# Altium PCB BRD110806.PcbDoc
Units mil, origin at the board's own origin, x right, y up, seen from the top; angles counter-clockwise.
Board outline 2710.03 x 2110.03 mil, 2 copper layers (Top Layer, Bottom Layer), stack 65.792 mil thick; 16 components, 30 nets, 118 pads, 16 vias.
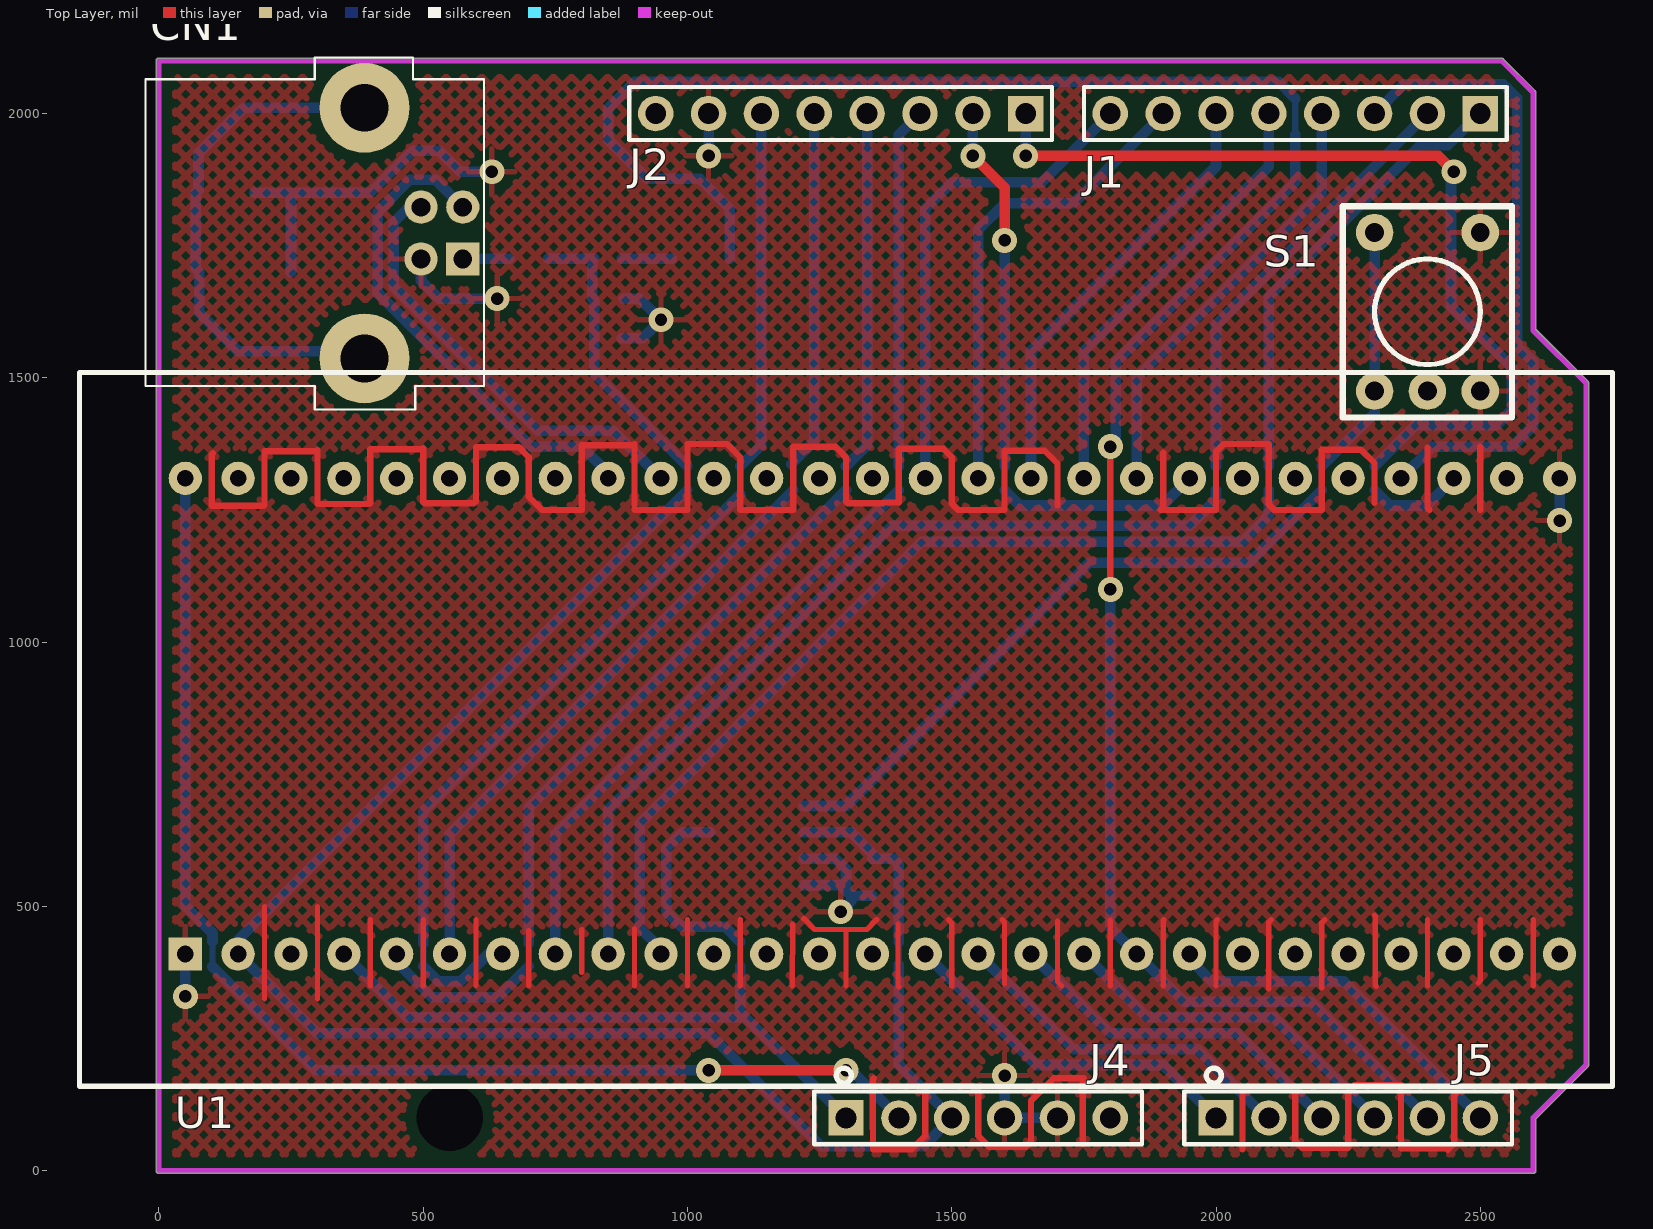
[diagram p0: Top Layer view]
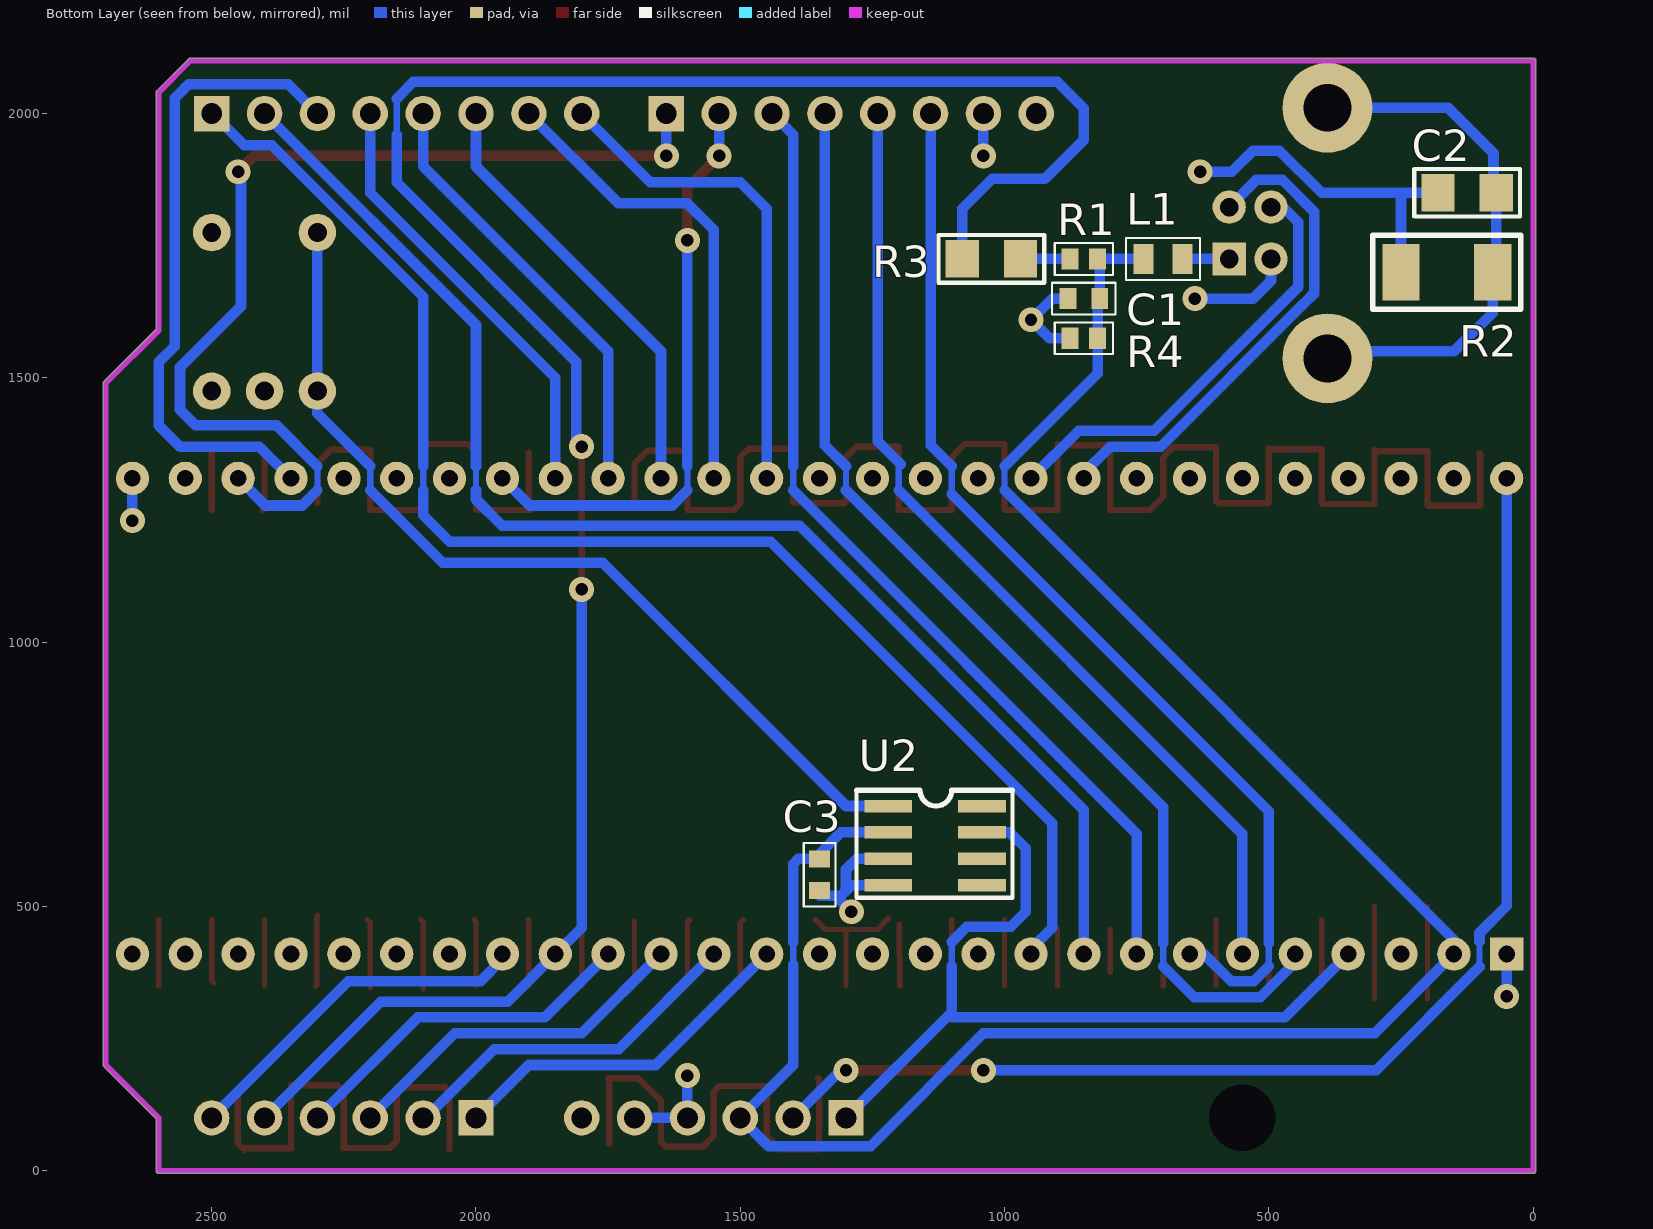
[diagram p1: Bottom Layer view, seen from below]

## Layer stack, top to bottom
Top Layer: signal copper 1.4
Dielectric: core 62.9921, FR-4, Dk 4.8
Bottom Layer: signal copper 1.4

## Board outline
0,-5.01 2600,-5.01 ccw(c2600,0) 2605.02,0 2605.02,97.92 2703.53,196.44 ccw(c2700,200) 2705.02,200 2705.02,1490 cw(c2702.5,1490) 2705.02,1489.97 ccw(c2700,1490) 2705.02,1490 ccw(c2700,1490) 2703.53,1493.56 2703.55,1493.55 2605.02,1592.08 2605.02,2040 cw(c2602.5,2040) 2605.02,2039.97 ccw(c2600,2040) 2605.02,2040 ccw(c2600,2040) 2603.53,2043.56 2603.55,2043.55 2543.55,2103.55 2543.56,2103.53 ccw(c2540,2100) 2540,2105.02 ccw(c2540,2102.5) 2539.97,2105.02 cw(c2540,2100) 2540,2105.02 0,2105.02 ccw(c0,2100) -5.01,2100 -5.01,0 ccw(c0,0)

## Design rules (kind name [scope] priority, off if disabled: settings)
Clearance Clearance_1 [InPolygon] p1: gap=20
Clearance Clearance_BoardEdge [InPolygon vs (OnLayer('Keep-Out Layer'))] p2: gap=15
Clearance [All] p3: gap=10
DiffPairsRouting [All] p1: maxlimit=10 minlimit=10 mostfreqgap=10 maxuncoupledlength=500
HoleSize [All] p1: absolutevalues=TRUE maxlimit=125.98 minlimit=23.62 maxpercent=80.000 minpercent=20.000
MinimumAnnularRing [All] p1: minimumring=10
PolygonConnect [All] p1: connectstyle=Relief reliefconductorwidth=10 reliefentries=4 polygonreliefangle="90 Angle"
RoutingVias [All] p1: holewidth=23.62 width=47.24 viastyle="Through Hole" minholewidth=23.62 minwidth=47.24 maxholewidth=23.62 maxwidth=47.24
SilkscreenOverComponentPads [All] p1: minsilkscreentomaskgap=10
SolderMaskExpansion [All] p1: expansion=0
Width [All] p1: maxlimit=100 minlimit=10 preferedwidth=20
25 further rules are at their usual default settings.

## Classes and differential pairs
differential pair USB_D: +USB_D_P -USB_D_N

## Components (designator, comment, footprint, x,y, rotation, side; value= is the part's Value field where it differs from the comment)
C1 "YCAM100N-3" CA_0603 850,1650 r0 bottom
C2 "YCAM10N-5" CA_1206 125,1850 r180 bottom
C3 "YCAM100N-3" CA_0603 1350,560 r90 bottom
CN1 "CNUSB04F3" CN_USB_B 575,1725 r270 top
J1 "SSW-108-01-T-S" CN_SOCKET8 2500,2000 r180 top
J2 "SSW-108-01-T-S" CN_SOCKET8 1640,2000 r180 top
J4 "SSW-106-01-T-S" CN_SOCKET6 1300,100 r0 top
J5 "SSW-106-01-T-S" CN_SOCKET6 2000,100 r0 top
L1 "47uH/120mA" CL_0805 700,1725 r0 bottom
R1 "YRES10K-1" RE_0603 850,1725 r180 bottom
R2 "1M/500V" RE_2010 250,1700 r180 bottom
R3 "0E" RE_1206 1025,1725 r0 bottom
R4 "YRES200K-1" RE_0603 850,1575 r180 bottom
S1 "KSJ0M411" SW_KSJ-M 2400,1475 r90 top
U1 "LPCXpresso LPC1769" MD_LPCXpresso 50,410 r90 top
U2 "YICSMAX707" SC_SOIC8 1220,690 r180 bottom

## Footprints (in the part's own frame and the unit in brackets; to place one, negate y for a bottom-side part, rotate by r counter-clockwise, add the part's x,y. Pads: shape width x height; smd on the part's side, far side on the other; paste and mask are expansions set on the pad)
CA_0603 [mil] "CA_0603"
  rect 32x40 smd: 1(-30,0) 2(30,0)
  silkscreen extent -60,-30 60,30, body extent -31,-16 31,16, height 12
CA_1206 [mm] "Chip Capacitor; Body 3.2 x 1.6 mm (LxW typ)"
  rect 1.6x1.8 smd: 1(-1.4,0) 2(1.4,0)
  silkscreen extent -2.54,-1.14 2.54,1.14, body extent -1.6,-0.8 1.6,0.8, height 1
CL_0805 [mil] "0805 package for coil or ferrite"
  rect 38x56 smd: 1(-37,0) 2(37,0)
  silkscreen extent -70,-40 70,40, body extent -39,-26 39,24, height 31
CN_SOCKET6 [mm] "Connector; Header; 6 Position"
  rect 1.7x1.7 hole 1: 1(0,0)
  round 1.7 hole 1: 2(2.54,0) 3(5.08,0) 4(7.62,0) 5(10.16,0) 6(12.7,0)
  silkscreen extent -1.52,-1.27 14.22,2.39, body extent -1.52,-1.27 14.22,1.14, height 8.52
CN_SOCKET8 [mm] "Connector; Header; 8 Position"
  rect 1.7x1.7 hole 1: 1(0,0)
  round 1.7 hole 1: 2(2.54,0) 3(5.08,0) 4(7.62,0) 5(10.16,0) 6(12.7,0) 7(15.24,0) 8(17.78,0)
  silkscreen extent -1.27,-1.27 19.05,1.27, body extent -1.52,-1.21 19.3,1.21, height 8.51
CN_USB_B [mil] "CN_USB_B"
  rect 63x63 hole 35.43: 1(0,0)
  round 63 hole 35.43: 2(-98,0) 3(-98,-79) 4(0,-79)
  round 170 hole 90.55: 5(-286,-186) 5(188,-186)
  silkscreen extent -381,-600 285,40, body extent -332,-590 234,28, height 453
MD_LPCXpresso [mm] "LPCXpresso board"
  rect 1.6x1.6 hole 0.8: 1(0,0)
  round 1.6 hole 0.8: 2(0,-2.54) 3(0,-5.08) 4(0,-7.62) 5(0,-10.16) 6(0,-12.7) 7(0,-15.24) 8(0,-17.78) 9(0,-20.32) 10(0,-22.86) 11(0,-25.4) 12(0,-27.94) 13(0,-30.48) 14(0,-33.02) 15(0,-35.56) 16(0,-38.1) 17(0,-40.64) 18(0,-43.18) 19(0,-45.72) 20(0,-48.26) 21(0,-50.8) 22(0,-53.34) 23(0,-55.88) 24(0,-58.42) 25(0,-60.96) 26(0,-63.5) 27(0,-66.04) 28(22.86,0) 29(22.86,-2.54) 30(22.86,-5.08) 31(22.86,-7.62) 32(22.86,-10.16) 33(22.86,-12.7) 34(22.86,-15.24) 35(22.86,-17.78) 36(22.86,-20.32) 37(22.86,-22.86) 38(22.86,-25.4) 39(22.86,-27.94) 40(22.86,-30.48) 41(22.86,-33.02) 42(22.86,-35.56) 43(22.86,-38.1) 44(22.86,-40.64) 45(22.86,-43.18) 46(22.86,-45.72) 47(22.86,-48.26) 48(22.86,-50.8) 49(22.86,-53.34) 50(22.86,-55.88) 51(22.86,-58.42) 52(22.86,-60.96) 53(22.86,-63.5) 54(22.86,-66.04)
  silkscreen extent -6.35,-68.58 27.94,5.08, body extent -6.35,-68.58 27.94,5.08, height 11.21
RE_0603 [mil] "RE_0603"
  rect 32x40 smd: 1(-26,0) 2(26,0)
  silkscreen extent -55,-30 55,30, body extent -31,-16 31,16, height 12
RE_1206 [mm] "Chip Resistor; Body 3.2 x 1.6 mm (LxW typ)"
  rect 1.6x1.8 smd: 1(-1.4,0) 2(1.4,0)
  silkscreen extent -2.54,-1.14 2.54,1.14, body extent -1.6,-0.8 1.6,0.8, height 1
RE_2010 [mm] "Chip Resistor; Body 5 x 2.5 mm (LxW typ)"
  rect 1.8x2.7 smd: 1(0,0) 2(4.4,0)
  silkscreen extent -1.36,-1.78 5.76,1.78, body extent -0.8,-1.35 5.2,1.35, height 0.62
SC_SOIC8 [mm] "8-Pin Small Outline Integrated Circuit 1.27 mm Pitch, IPC High Density"
  rect 2.3x0.6 smd: 1(0,0) 2(0,-1.27) 3(0,-2.54) 4(0,-3.81) 5(4.5,-3.81) 6(4.5,-2.54) 7(4.5,-1.27) 8(4.5,0)
  silkscreen extent -1.52,-4.41 5.97,0.76, body extent -0.74,-4.36 5.31,0.54, height 1.68
SW_KSJ-M [mm] "C&K SPST switch"
  round 1.8 hole 0.9: 0(0,0) 1(0,-2.54) 1(7.62,-2.54) 2(0,2.54) 2(7.62,2.54)
  silkscreen extent -1.27,-4.06 8.89,4.06, body extent -0.65,-3.7 8.27,3.7, height 6.63

## Part data
C1 C3: library part YCAM100n-3
J1 J2 J4 J5: "*"
L1: library part L0805C470MDWIT
R1 R4: "Resistor"
R2: library part LHVC2010-1MFT4, "Resistor"
R3: library part YRES0E, "Resistor"
U1: library part OM13000

## Free pads (board coordinates)
  round 0 hole 125.98 unplated: 0(550,100)

## Via types
v1: diameter 47.24, hole 23.62, Top Layer to Bottom Layer, 16 vias

## Nets (pads, with @x,y where several pads share a name; then routed paths per layer and width w, separated by ;. In a path a pad name is that pad's centre, name@x,y a point inside that pad or via, vN(x,y) a via of type N, cw(c..) or ccw(c..) an arc to the next point about the centre after c; other vN are vias at no path point)
+3.3V: J4.2 U1.28 | length 2362.5
  Top Layer w20: v1(1040,190) v1(1300,190)
  Bottom Layer w12: 101.5,385.68 101.5,434.32
  Bottom Layer w20: U1.28 50,501.28 101.5,449.78 101.5,434.32 ; 101.5,385.68 297.17,190 v1(1040,190) ; v1(1300,190) 1310,190 J4.2
+5V: C1.1 C3.2 J4.3 L1.2 R1.2 R4.2 U1.2 U2.2 | length 4075.1
  Bottom Layer w12: 1000,1287.17 1000,1332.83 ; 1400,390 1400,432.83
  Bottom Layer w20: L1.2 R1.2 820,1721 C1.1 824,1646 R4.2 824,1508.83 1000,1332.83 ; 1000,1287.17 150,437.17 U1.2 300,260 1040,260 1253.46,46.54 1446.54,46.54 J4.3 1400,200 1400,390 ; U2.2 1310,640 C3.2@1350,600 ; C3.2 1390,590 1400,580 1400,432.83
AIN0: J5.1 U1.15 | length 678.4
  Bottom Layer w20: U1.15 1660,200 1900,200 J5.1
AIN1: J5.2 U1.16 | length 678.4
  Bottom Layer w20: U1.16 1730,230 1965.21,230 2095.21,100 J5.2
AIN2: J5.3 U1.17 | length 678.4
  Bottom Layer w20: U1.17 1800,260 2040,260 J5.3
AIN3: J5.4 U1.18 | length 678.4
  Bottom Layer w20: U1.18 1870,290 2110,290 J5.4
AIN4: J5.5 R3.2 U1.19 | length 4255.2
  Top Layer w12: v1(1800,1100) v1(1800,1370)
  Bottom Layer w12: 2150,1960 2150,2028.39
  Bottom Layer w20: R3.2 1080.12,1819.88 1023.62,1876.38 923.62,1876.38 850,1950 850,2010 900,2060 2118.39,2060 2150,2028.39 ; v1(1800,1100) 1800,460 U1.19 1940,320 2180,320 J5.5 ; v1(1800,1370) 1800,1360 1810,1370 1810,1530 2150,1870 2150,1960
AIN5: J5.6 U1.20 | length 684.3
  Bottom Layer w20: U1.20 1950,400 1991.5,358.5 2241.5,358.5 J5.6
EINT0: J1.3 U1.51 | length 1227.3
  Bottom Layer w20: J1.3 2355.43,2055.43 2543.72,2055.43 2549.15,2050 2550,2050 2550,2049.15 2570,2029.15 2570,1560 2600,1530 2600,1410 2560,1370 2410,1370 U1.51
EINT1: J2.1 U1.52 | length 1935.7
  Top Layer w20: v1(1640,1920) 2420,1920 v1(2450,1890)
  Bottom Layer w12: 2300,1287.17 2300,1332.83
  Bottom Layer w20: v1(1640,1920) J2.1 ; 2300,1287.17 2328.67,1258.5 2398.5,1258.5 U1.52 ; 2300,1332.83 2377.17,1410 2530,1410 2560,1440 2560,1520 2444.57,1635.43 2444.57,1884.57 v1(2450,1890)
GND: C1.2 C2.1 C3.1 CN1.4 J2.7 J4.4 J4.5 R2.1 R4.1 S1.1 U1.1 U1.54 U2.3 U2.4 | length 11548.2
  Top Layer w10: 200,325 200,500 ; 300,325 300,500 ; 400,350 400,475 ; 500,350 500,475 ; 600,350.51 600,475 ; 700,350 700,454.16 ; 800,375 800,455.98 ; 900,350 900,457.81 ; 1000,349.65 1000,475 ; 1100,349.65 1100,475 ; 1198.53,350 1199.25,466.48 ; 1220.34,476.88 1240.72,456.5 1300,456.5 ; 1300,349.65 1300,456.5 ; 1357.98,475 1339.48,456.5 1300,456.5 ; 1398.55,466.48 1398.55,349.28 1400,347.83 ; 1493.75,475 1500,468.75 1500,350 ; 1595.57,475 1600,470.57 1600,353.49 ; 1700,472.39 1700,357.64 1707.64,350 ; 1800,350 1800,474.22 ; 1900,350 1900,473.96 1901.04,475 ; 2000,350 2000,472.14 2002.86,475 ; 2100,343.92 2100,470.31 2104.69,475 ; 2200,345.74 2200,469 2206,475 ; 2300,483.33 2301.36,481.97 2301.36,350.95 2303.32,348.99 ; 2400,349.39 2400,475 ; 2496.04,355.17 2500,359.13 2500,475 ; 2600,350 2600,475
  Top Layer w12: 101.9,1357.73 100,1355.82 100,1257.81 198.18,1257.81 200,1259.63 200,1361.45 298.18,1361.45 300,1363.28 300,1261.45 398.18,1261.45 400,1263.28 400,1365.1 498.18,1365.1 500,1366.92 500,1265.1 502.6,1262.5 595.58,1262.5 600,1266.92 600,1368.75 681.25,1368.75 700,1350 700,1275 725,1250 800,1250 800,1372.39 898.18,1372.39 900,1374.22 900,1250 1000,1250 1000,1375 1075,1375 1100,1350 1100,1250 1200,1250 1200,1369.71 1280.29,1369.71 1300,1350 1300,1266.06 1303.56,1262.5 1369.67,1262.5 1371.41,1264.24 1400,1264.24 1400,1366.06 1483.94,1366.06 1500,1350 1500,1262.41 1512.41,1250 1600,1250 1600,1362.41 1675.97,1362.41 1700,1338.39 1700,1258.77 ; 1352.51,175 1350.54,173.02 1350.54,79.51 1351.21,78.83 1351.21,40.54 1424.38,40.54 1450,66.15 1450,160.24 1539.76,160.24 1550,150 1550,66.16 1570.46,45.7 1640.93,45.7 1650,54.77 1650,132.19 1692.81,175 1750,175 1748.05,173.05 1748.05,50.99 ; 1900,1358.51 1900,1255.12 1894.88,1250 2000,1250 2000,1360.33 2014.67,1375 2100,1375 2100,1260.33 2110.33,1250 2200.35,1250 2200,1250.35 2200,1363.98 2274.41,1363.98 2300,1338.39 2300,1263.98 ; 2050,40.54 2050,149.3 2059.46,158.76 2060.07,158.16 2150,158.16 2150,56.33 2163.34,42.99 2249.16,42.99 2250,43.83 2250,150 2261.8,161.8 2350,161.8 2350,43.14 2350.57,42.57 2435.29,42.57 2438.18,39.68 2450.54,52.04 2450.54,142.54 2454,146 ; 2400,1367.63 2400,1254 2404,1250 ; 2500,1250 2500,1369.45
  Bottom Layer w20: v1(50,330) U1.1 ; C2.1 250,1850 ; R2.1 250,1850 ; CN1.4 496,1684 530,1650 v1(640,1650) ; v1(630,1890) 570,1890 530,1930 480,1930 400,1850 250,1850 ; R4.1 915,1575 v1(950,1610) 910,1650 C1.2 ; v1(1040,1920) J2.7 ; U2.4 1290,540 1300,530 ; U2.3 1280,590 1300,570 1300,530 ; v1(1290,490) 1310,510 1310,520 ; C3.1@1350,520 1310,520 ; v1(1600,180) J4.4 J4.5 ; v1(2650,1230) U1.54 ; 1300,530 1310,520
MISO: J2.5 U1.6 | length 1878.8
  Bottom Layer w12: 1196.41,1336.41 1200,1332.83 1200,1287.17
  Bottom Layer w20: U1.6 550,637.17 1200,1287.17 ; 1196.41,1336.41 1240,1380 J2.5
MOSI: J2.4 U1.5 | length 2194.9
  Bottom Layer w12: 700,387.17 700,430 ; 1300,1287.17 1300,1332.83
  Bottom Layer w20: U1.5 450,394.75 516.24,328.5 641.33,328.5 700,387.17 ; 700,430 700,687.17 1300,1287.17 ; 1300,1332.83 1340,1372.83 J2.4
NetCN1_1: CN1.1 L1.1 | length 88
  Bottom Layer w20: CN1.1 L1.1
NetS1_2: S1.2 U2.1 | length 1756.6
  Bottom Layer w12: 2200,1287.17 2200,1332.83
  Bottom Layer w20: U2.1 1300,690 1760,1150 2062.83,1150 2200,1287.17 ; 2200,1332.83 2300,1432.83 2300,1475 S1.2@2300,1775
"P2.0 PWM1.1": J1.8 U1.42 | length 934.6
  Bottom Layer w20: U1.42 1450,1820 1500,1870 1670,1870 J1.8
"P2.1 PWM1.2": J1.7 U1.43 | length 911.1
  Bottom Layer w20: U1.43 1550,1780 1600,1830 1730,1830 J1.7
"P2.2 PWM1.3": J1.6 U1.44 | length 835
  Bottom Layer w20: U1.44 1650,1550 2000,1900 J1.6
"P2.3 PWM1.4": J1.5 U1.45 | length 835
  Bottom Layer w20: U1.45 1750,1550 2100,1900 J1.5
"P2.4 PWM1.5": J1.4 U1.46 | length 835
  Bottom Layer w20: U1.46 1850,1500 2200,1850 J1.4
"P2.5 PWM1.6": J2.2 U1.47 | length 1121.7
  Top Layer w20: v1(1540,1920) 1600,1860 v1(1600,1760)
  Bottom Layer w12: 1600,1287.17 1600,1332.83
  Bottom Layer w20: v1(1540,1920) J2.2 J2.2@1540.85,2000 ; 1600,1287.17 1628.67,1258.5 1898.5,1258.5 U1.47 ; 1600,1332.83 v1(1600,1760)
PE: C2.2 CN1.5 R2.2 | length 1004.3
  Bottom Layer w20: CN1.5@389,1537 376,1550 150,1550 76.77,1623.23 R2.2 69.88,1706.89 C2.2 75,1855.12 75,1925 161,2011 CN1.5@389,2011
RESET_N: J4.1 U1.4 U2.7 | length 1601.5
  Bottom Layer w12: 1100,390 1100,432.83
  Bottom Layer w20: U1.4 470,290 1100,290 1100,387.17 ; U2.7 990,640 960,610 960,490 988.5,461.5 1071.33,461.5 1100,432.83 ; 1100,300 J4.1
RXD3: J1.1 U1.10 | length 2652.3
  Bottom Layer w12: 2100,1287.17 2100,1332.83
  Bottom Layer w20: U1.10 950,420 910,460 910,657.54 1442.46,1190 2050,1190 2100,1240 2100,1287.17 ; 2100,1332.83 2100,1653.39 2386.61,1940 2438.31,1940 2498.31,2000 J1.1
SCK: J2.6 U1.7 | length 2061.1
  Bottom Layer w12: 500,387.17 500,430 ; 1100,1280 1100,1332.83
  Bottom Layer w20: 500,387.17 528.67,358.5 571.33,358.5 622.83,410 U1.7 ; 500,430 500,680 1100,1280 ; 1100,1332.83 1140,1372.83 J2.6
SSEL: J2.3 U1.8 | length 1875.8
  Bottom Layer w12: 1400,1287.17 1400,1332.83
  Bottom Layer w20: U1.8 750,637.17 1400,1287.17 ; 1400,1332.83 1400,1960 J2.3
TXD3: J1.2 U1.9 | length 2561.5
  Bottom Layer w12: 2000,1287.17 2000,1332.83
  Bottom Layer w20: U1.9 850,682.43 1387.57,1220 1950,1220 2000,1270 2000,1287.17 ; 2000,1332.83 2000,1600 J1.2
USB_D_N: CN1.2 U1.36 | length 947.7
  Bottom Layer w20: CN1.2 523.5,1874.5 474.67,1874.5 414.5,1814.33 414.5,1659.57 432.07,1642 432.49,1642 704.49,1370 800,1370 850,1320 U1.36
USB_D_P: CN1.3 U1.37 | length 842.9
  Bottom Layer w20: CN1.3 494,1825 475,1825 444.5,1794.5 444.5,1672 444.92,1672 716.92,1400 860,1400 U1.37
VBUS: R1.1 R3.1 | length 93.9
  Bottom Layer w20: R1.1 R3.1
pads on no net: J2.8 J4.6 S1.0 U1.3 U1.11 U1.12 U1.13 U1.14 U1.21 U1.22 U1.23 U1.24 U1.25 U1.26 U1.27 U1.29 U1.30 U1.31 U1.32 U1.33 U1.34 U1.35 U1.38 U1.39 U1.40 U1.41 U1.48 U1.49 U1.50 U1.53 U2.5 U2.6 U2.8

## Polygon pours and split planes (outlines as drawn)
GND on Top Layer "GND_TOP" (hatched 45Degree grid 24 track 12, remove dead copper, pour order 2): -425,2425 2900,2425 2900,-200 -425,-200

## Keep-outs
Keep-Out Layer:
  lines w10: 0,0 0,2100 2540,2100 2600,2040 2600,1590 2700,1490 2700,200 2600,100 2600,0 0,0

## Silkscreen, mask and mechanical layers (free items; w line width, h text height)
PcbOutline:
  lines w10: 0,0 0,2100 2540,2100 2600,2040 2600,1590 2700,1490 2700,200 2600,100 2600,0 0,0
Mechanical 16:
  drawing of 4360 lines, arcs and shapes, not listed
  text "A" at 4656.5,3700.5 h70 r90
  text "D" at -993.5,3650.5 h70 r270
  text "C" at 881.5,3650.5 h70 r270
  text "B" at 2681.5,3650.5 h70 r270
  text "2" at -1843.5,2325.5 h70 r90
  text "2" at 5556.5,2325.5 h70 r90
  text "1" at -1843.5,-524.5 h70 r90
  text "1" at 5556.5,-524.5 h70 r90
  text "ENGINEER:" at 971.5,-667.5 h45
  text "TITLE:" at 2471.5,-667.5 h45
  text ".ProjectName" at 2756.5,-927.5 h98.43
  text "PCB DESIGNER:" at 971.5,-962.5 h45
  text ".DrawnByX" at 1531.5,-1082.5 h98.43
  text "DATE:" at 971.5,-1267.5 h45
  text "PART NO.:" at 2471.5,-1267.5 h45
  text "REV:" at 4571.5,-1267.5 h45
  text ".PRINT_DATE" at 1021.5,-1387.5 h70
  text ".RevisionNR" at 4609.5,-1442.5 h98.43
  text "FILE NAME:" at 971.5,-1567.5 h45
  text "DWG NO:" at 2471.5,-1567.5 h45
  text "SCALE:" at 4571.5,-1567.5 h45
  text ".PCB_FILE_NAME_NO_PATH" at 1021.5,-1687.5 h70
  text ".PCB_Nr" at 2781.5,-1699.5 h98.43
  text "D" at -1111.5,-1893.5 h70 r270
  text "C" at 778.5,-1893.5 h70 r270
  text "B" at 2688.5,-1893.5 h70 r270
  text "A" at 4656.5,-1899.5 h70 r90
Drill Drawing:
  lines w12: -1700,-400 -1700,-500 -1600,-500 ; -1700,3400 -1700,3500 -1600,3500 ; 5300,-500 5400,-500 5400,-400 ; 5300,3500 5400,3500 5400,3400
  text ".Legend" at 2850,490 h60
Mechanical 17:
  drawing of 4360 lines, arcs and shapes, not listed
  text "A" at -1013.5,3700.5 h70 r270
  text "B" at 961.5,3650.5 h70 r90
  text "C" at 2761.5,3650.5 h70 r90
  text "D" at 4636.5,3650.5 h70 r90
  text "2" at -1913.5,2325.5 h70 r270
  text "2" at 5486.5,2325.5 h70 r270
  text "1" at -1913.5,-524.5 h70 r270
  text "1" at 5486.5,-524.5 h70 r270
  text "TITLE:" at 1171.5,-667.5 h45
  text "ENGINEER:" at 2671.5,-667.5 h45
  text ".ProjectName" at 886.5,-927.5 h98.43
  text "PCB DESIGNER:" at 2671.5,-962.5 h45
  text ".DrawnByX" at 2131.5,-1074.5 h98.43
  text "REV:" at -928.5,-1267.5 h45
  text "PART NO.:" at 1171.5,-1267.5 h45
  text "DATE:" at 2671.5,-1267.5 h45
  text ".PRINT_DATE" at 2621.5,-1387.5 h70
  text ".RevisionNR" at -966.5,-1442.5 h98.43
  text "SCALE:" at -928.5,-1567.5 h45
  text "DWG NO:" at 1171.5,-1567.5 h45
  text "FILE NAME:" at 2671.5,-1567.5 h45
  text ".PCB_FILE_NAME_NO_PATH" at 2621.5,-1687.5 h70
  text ".PCB_Nr" at 861.5,-1699.5 h98.43
  text "B" at 954.5,-1893.5 h70 r90
  text "C" at 2864.5,-1893.5 h70 r90
  text "D" at 4754.5,-1893.5 h70 r90
  text "A" at -1013.5,-1899.5 h70 r270

## Dimensions
-5.01,2100 to 2705.02,1489.97 on Measures
0,-5.01 to -5.01,2100 on Measures